# Altium PCB 矩形板V1.0.pcbdoc (part 1 of 2)
Units mm, origin at the board's own origin, x right, y up, seen from the top; angles counter-clockwise.
Board outline 153.82 x 190.84 mm, 2 copper layers (Top Layer, Bottom Layer); 147 components, 203 nets, 678 pads, 268 vias.
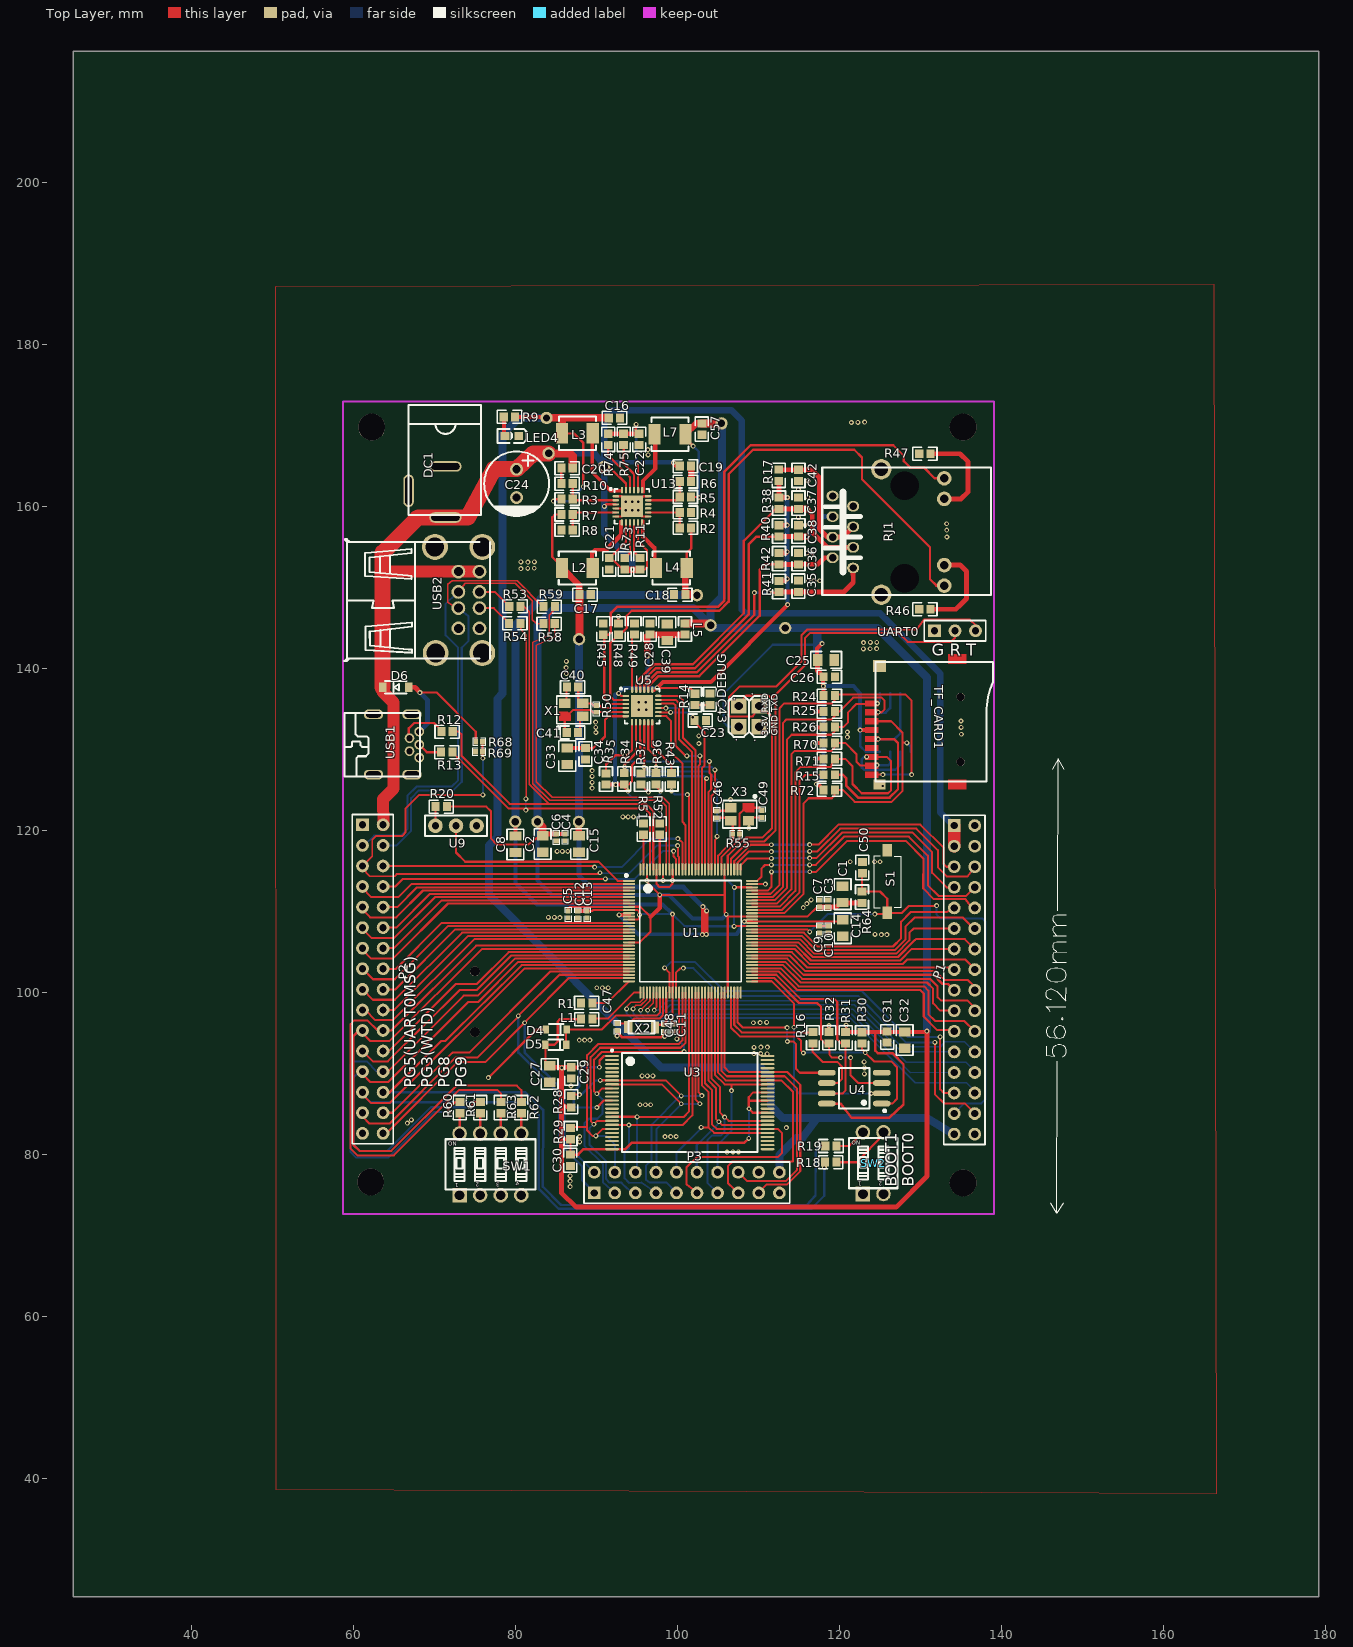
[diagram p0: Top Layer view]
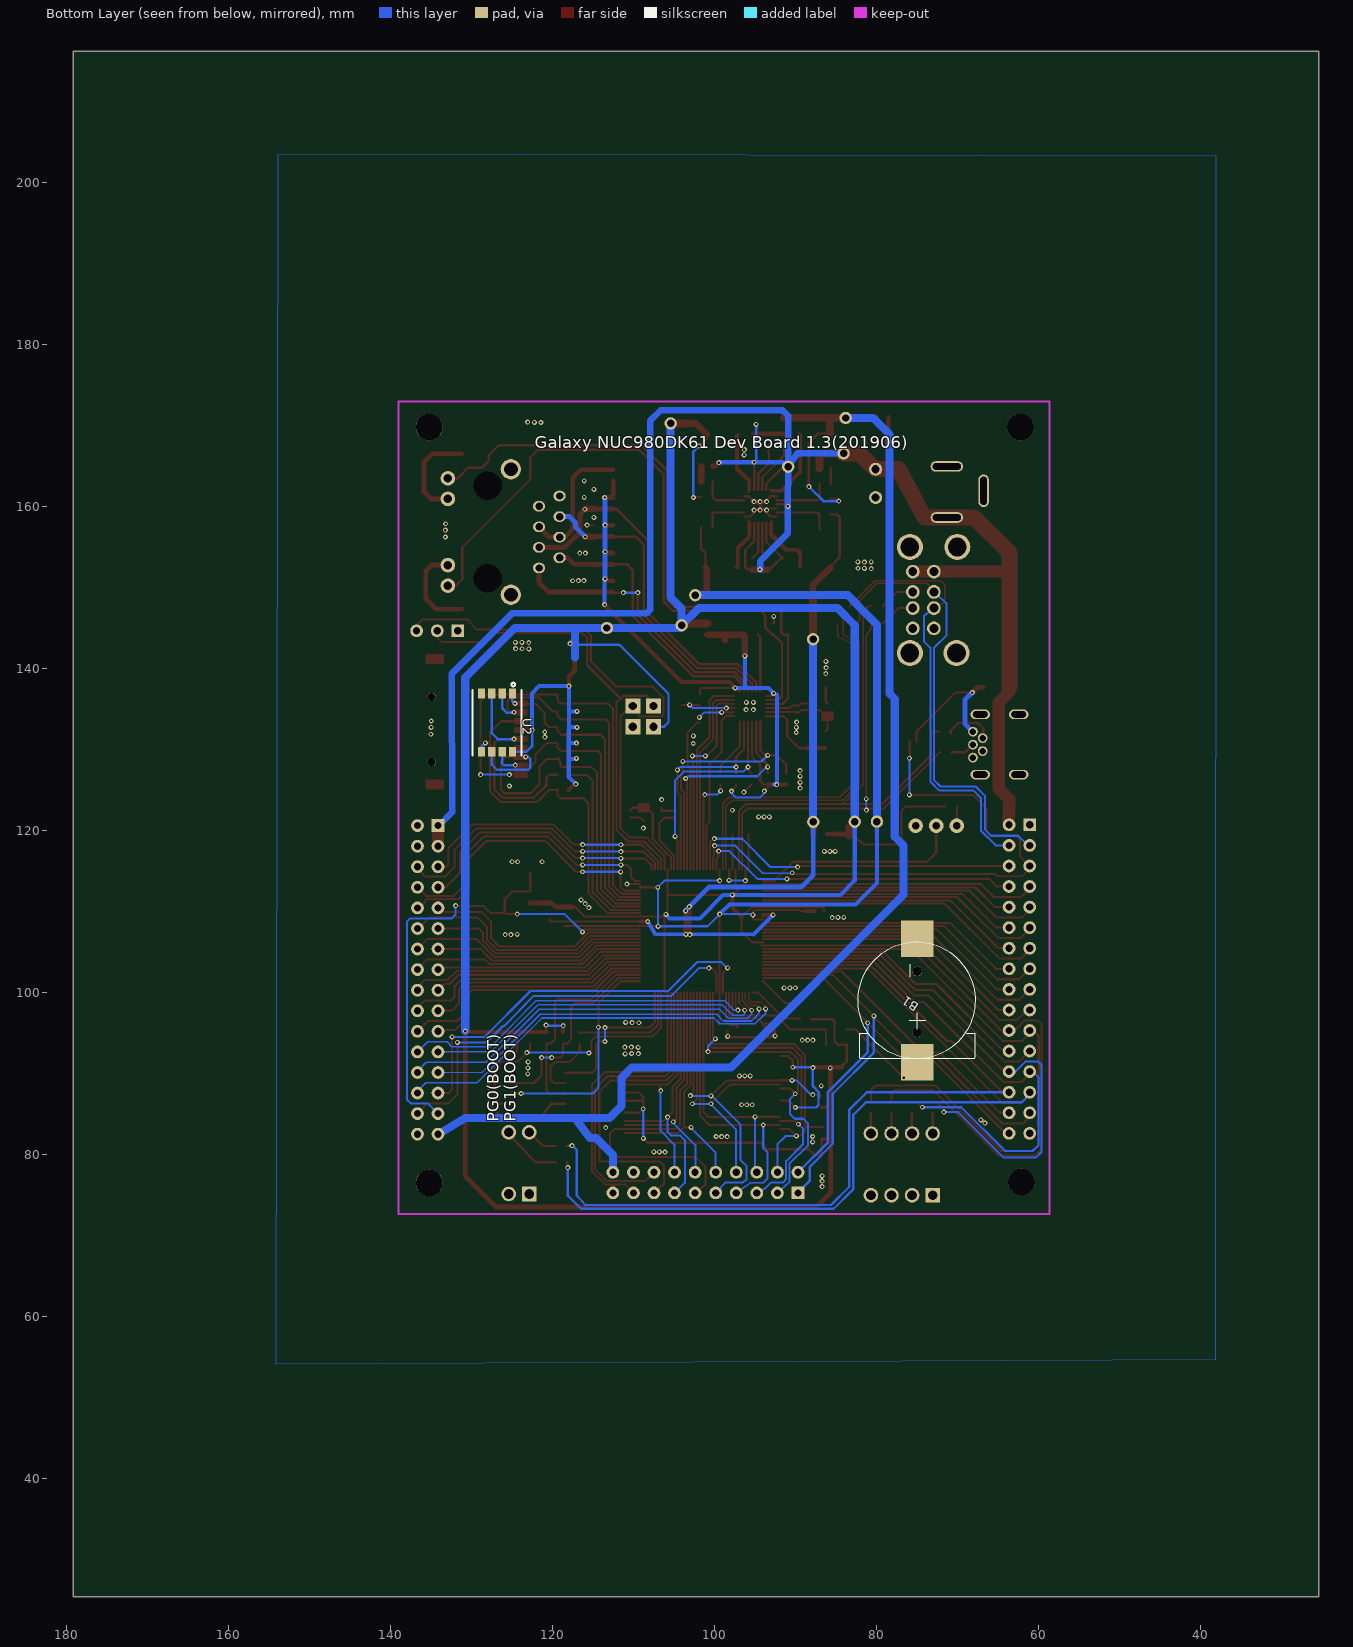
[diagram p1: Bottom Layer view, seen from below]

## Layer stack, top to bottom
Top Layer: signal copper (thickness not stored)
Dielectric: dielectric 0.32, FR-4, Dk 4.8
Bottom Layer: signal copper (thickness not stored)

## Board outline
179.22,25.4 25.4,25.4 25.4,216.24 179.22,216.24

## Components (designator, comment, footprint, x,y, rotation, side; value= is the part's Value field where it differs from the comment)
B1 "CR1220-2" BATTERY-2 74.996,99.039 r270 bottom
C1 "10uF" 0805 120.396,112.139 r270 top
C2 "10uF" 0805 83.362,118.371 r90 top
C3 "100nF" 0402 118.58,111 r270 top
C4 "100nF" 0402 86.12,119.18 r90 top
C5 "100nF" 0402 86.5,109.66 r90 top
C6 "100nF" 0402 85.04,119.16 r90 top
C7 "100nF" 0402 117.56,111 r270 top
C8 "10uF" 0805 80,118.316 r90 top
C9 "100nF" 0402 117.56,107.78 r90 top
C10 "100nF" 0402 118.64,107.78 r90 top
C11 "100nF" 0402 99.46,95.66 r90 top
C12 "100nF" 0402 87.68,109.64 r90 top
C13 "100nF" 0402 88.84,109.64 r90 top
C14 "10uF" 0805 120.42,107.96 r90 top
C15 "10uF" 0805 87.86,118.36 r90 top
C16 "10uF" 0603 92.224,170.98 r180 top
C17 "10uF" 0603 88.596,149.139 r180 top
C18 "22uF" 0603 100.296,149.139 r0 top
C19 "10uF" 0603 100.987,165.011 r180 top
C20 "10uF" 0603 86.382,164.757 r0 top
C21 "10uF" 0603 91.589,152.946 r90 top
C22 "10uF" 0603 95.272,168.313 r90 top
C23 "15pF" 0603 102.82,133.6 r180 top
C24 "470uF" CAP-D8.0XF3.5 80.14,162.88 r0 top
C25 "10uF" 0805 118.36,141.08 r180 top
C26 "100nF" 0603 118.76,139 r180 top
C27 "10uF" 0805 84.223,89.954 r90 top
C28 "100nF" 0603 96.6,144.9 r270 top
C29 "100nF" 0603 86.89,90.081 r270 top
C30 "100nF" 0603 86.78,79.3 r90 top
C31 "100nF" 0603 125.9,94.52 r270 top
C32 "10uF" 0805 128.06,94.12 r270 top
C33 "10uF" 0805 86.396,129.189 r270 top
C34 "100nF" 0603 88.646,129.489 r270 top
C35 "10pF" 0603 114.946,150.189 r90 top
C36 "10pF" 0603 114.957,153.581 r90 top
C37 "10pF" 0603 114.957,160.439 r90 top
C38 "10pF" 0603 114.957,157.01 r90 top
C39 "10uF" 0805 98.74,144.5 r270 top
C40 "22pF" 0603 87.06,137.72 r180 top
C41 "22pF" 0603 87.04,132.12 r180 top
C42 "22nF" 0603 114.957,163.868 r270 top
C43 "100nF" 0603 104.02,136.22 r270 top
C46 "15pF" 0402 104.86,122.02 r270 top
C47 "15pF" 0402 92.58,95.74 r90 top
C48 "15pF" 0402 98.42,95.65 r90 top
C49 "15pF" 0402 110.46,122.06 r90 top
C50 "1uF" 0603 122.846,115.439 r270 top
C57 "10uF" 0603 103.019,169.583 r90 top
D4 "1N4148WS T4" SOD-323 85.04,95.44 r0 top
D5 "1N4148WS T4" SOD-323 84.98,93.56 r0 top
D6 "DSK14" SOD-123 65.22,137.7 r0 top
DC1 "DC005-2.5MM" DC-5020 69.08,161.82 r270 top
DEBUG "4pin2x2" 4PINO 110.12,135.38 r270 top
L1 "0Ω" 0603 88.801,96.72 r0 top
L2 "1.5uH" L-SMD-4.1X4.6 87.646,152.439 r0 top
L3 "1.5uH" L-SMD-4.1X4.6 87.652,169.075 r0 top
L4 "1uH" L-SMD-4.1X4.6 99.246,152.439 r180 top
L5 "0Ω" 0603 100.94,144.9 r270 top
L7 "1.5uH" L-SMD-4.1X4.6 99.082,168.948 r180 top
LED4 "KT-0603R" LED-0603 79.55,168.76 r180 top
P1 "Header-Female-2.54_2x16" HDR-16X2/2.54 136.72,100.3 r270 top
P2 "Header-Female-2.54_2x16" HDR-16X2/2.54 63.66,100.4 r270 top
P3 "Header-Female-2.54_2x10" HDR-10X2/2.54 101.16,76.54 r0 top
R1 "0" 0603 88.8,98.74 r0 top
R2 "100K" 0603 100.987,157.391 r0 top
R3 "510K" 0603 86.382,160.947 r180 top
R4 "100K" 0603 100.987,159.296 r180 top
R5 "510K" 0603 100.987,161.201 r0 top
R6 "110K" 0603 100.987,163.106 r180 top
R7 "200K" 0603 86.382,159.042 r180 top
R8 "100K" 0603 86.382,157.137 r0 top
R9 "1K" 0603 79.26,171.09 r180 top
R10 "110K" 0603 86.382,162.852 r0 top
R11 "1K" 0603 95.399,152.946 r90 top
R12 "27" 0603 71.56,132.22 r0 top
R13 "27" 0603 71.52,129.7 r0 top
R14 "33" 0603 102.18,136.2 r90 top
R15 "0" 0603 118.76,126.9 r0 top
R16 "0" 0603 116.74,94.42 r90 top
R17 "0" 0603 112.52,163.88 r270 top
R18 "10K" 0603 118.94,79.06 r0 top
R19 "10K" 0603 118.96,81.06 r0 top
R20 "10K" 0603 70.84,122.96 r0 top
R24 "10K" 0603 118.76,136.68 r180 top
R25 "10K" 0603 118.76,134.7 r180 top
R26 "10K" 0603 118.76,132.78 r180 top
R28 "100K" 0603 86.89,86.525 r270 top
R29 "100K" 0603 86.796,82.589 r90 top
R30 "10K" 0603 122.8,94.4 r90 top
R31 "10K" 0603 120.78,94.42 r90 top
R32 "10K" 0603 118.74,94.42 r90 top
R34 "4.7K" 0603 93.44,126.4 r90 top
R35 "4.7K" 0603 91.18,126.38 r90 top
R36 "4.7K" 0603 97.36,126.4 r90 top
R37 "4.7K" 0603 95.5,126.38 r90 top
R38 "49.9" 0603 112.544,160.439 r90 top
R40 "49.9" 0603 112.544,157.01 r90 top
R41 "49.9" 0603 112.544,150.152 r90 top
R42 "49.9" 0603 112.544,153.581 r90 top
R43 "510" 0603 99.28,126.4 r90 top
R45 "10K" 0603 90.84,144.891 r270 top
R46 "470" 0603 130.56,147.34 r0 top
R47 "470" 0603 130.56,166.539 r0 top
R48 "10K" 0603 92.745,144.891 r270 top
R49 "12.1K" 0603 94.7,144.9 r270 top
R50 "1M" 0402 89.996,135.039 r90 top
R51 "12.1K" 0603 95.819,120.194 r270 top
R52 "12.1K" 0603 97.82,120.194 r270 top
R53 "4.7" 0603 79.94,147.7 r0 top
R54 "4.7" 0603 79.92,145.6 r0 top
R55 "1M" 0402 107.255,119.578 r180 top
R58 "4.7" 0603 84.16,145.56 r0 top
R59 "4.7" 0603 84.18,147.66 r0 top
R60 "10K" 0603 73.14,85.8 r270 top
R61 "10K" 0603 75.66,85.8 r270 top
R62 "10K" 0603 80.74,85.8 r270 top
R63 "10K" 0603 78.2,85.8 r270 top
R64 "100K" 0603 122.796,111.789 r270 top
R68 "20K" 0402 75.52,130.98 r180 top
R69 "39K" 0402 75.5,129.74 r0 top
R70 "10K" 0603 118.76,130.84 r180 top
R71 "10K" 0603 118.76,128.86 r180 top
R72 "10K" 0603 118.76,125.04 r180 top
R73 "1K" 0603 93.494,152.946 r90 top
R74 "1K" 0603 91.462,168.313 r90 top
R75 "1K" 0603 93.367,168.313 r90 top
RJ1 "HR911105A" RJ45-LIGHT 126.06,156.88 r90 top
S1 "复位按键" 复位开关 126.046,113.789 r270 top
SW1 "NDI-04H-V" NDI-04H-V 76.91,78.79 r0 top
SW2 "NDI-02H-V" NDI-02H-V 124.18,78.94 r0 top
TF_CARD1 "TF_CARD" TF-115_MRS 123.974,126.911 r0 top
U1 "NUC980DK61Y" LQFP-128_14X14X04P 101.62,107.6 r0 top
U2 "MKDV4GIL-AS" LGA-8_8PIN-L6.10-W8.10-PITCH0.65-TL 126.9,133.34 r90 bottom
U3 "MT29F2G08ABAEAWP-IT:E" TSOP-48 101.53,86.42 r90 top
U4 "W25Q128JVSIQTR" SOIC-8_208MIL 121.84,88.2 r180 top
U5 "LAN8720AI" QFN-24_4X4X05P 95.64,135.4 r0 top
U9 "3pin插针" 3PIN插针 75.2,120.6 r180 top
U13 "EA3059" QFN-24_4X4X05P 94.384,160.057 r0 top
UART0 "2.54排针 3pin" HDR-3X1/2.54 134.28,144.68 r0 top
USB1 "Mini USB-B 5P-Female-TH_C46398" USB-MINI-2 65.296,130.639 r270 top
USB2 "Double layer DIP 90° black" USB-M-51 72.98,148.48 r270 top
X1 "25MHz" OSC-YSX-3225_4P 87.2,134.92 r0 top
X2 "32.768KHz" SMD-3215_2P 95.58,95.72 r0 top
X3 "12MHz" OSC-YSX-3225_4P 107.68,122.02 r180 top
? "" ? 146.777,100.8 r0 top

## Footprints (in the part's own frame and the unit in brackets; to place one, negate y for a bottom-side part, rotate by r counter-clockwise, add the part's x,y. Pads: shape width x height; smd on the part's side, far side on the other; paste and mask are expansions set on the pad)
3PIN插针 [mm]
  round 1.8 hole 0.9: 1(0,0) 2(2.54,0) 3(5.08,0)
  silkscreen extent -1.27,-1.27 6.35,1.27
4PINO [mil]
  rect 74x74 hole 40: a(0,0) b(100,0) c(0,-100) d(100,-100)
  silkscreen extent -50,-150 150,50
0402 [mm]
  rect 0.6x0.65 smd: 1(-0.424,0) 2(0.424,0)
  silkscreen extent -0.82,-0.43 0.81,0.43
0603 [mm]
  rect 1x1.1 smd: 1(-0.7,0) 2(0.7,0)
  silkscreen extent -1.5,-0.8 1.5,0.8
0805 [mm]
  rect 1.16x1.45 smd: 1(-1.016,0) 2(1.016,0)
  silkscreen extent -1.9,-1.03 1.87,1.04
BATTERY-2 [mm]
  round 1.2 hole 1.2: 0(-3.581,0) 0(3.912,0)
  rect 4.5x4 smd: 1(7.62,0) 2(-7.62,0)
  silkscreen extent -7.22,-7.3 7.22,7.14
CAP-D8.0XF3.5 [mm]
  round 1.6 hole 1: 1(0,1.75) 2(0,-1.75)
  silkscreen extent -4,-4.04 4,3.96
DC-5020 [mm]
  oval 1.3x3.999 hole 0.8 slot 3.5 at 90 deg: 1(3.15,2.275) 2(-3.15,2.275)
  oval 3.999x1.3 hole 0.8 slot 3.5 at 0 deg: 3(-0.15,-2.275)
  silkscreen extent -10.75,-2.28 2.85,6.67
HDR-3X1/2.54 [mil]
  rect 62x62 hole 35: 1(-100,0)
  round 62 hole 35: 2(0,0) 3(100,0)
  silkscreen extent -150,-50 150,50
HDR-10X2/2.54 [mil]
  rect 62x62 hole 35: 1(-450,-50)
  round 62 hole 35: 2(-450,50) 3(-350,-50) 4(-350,50) 5(-250,-50) 6(-250,50) 7(-150,-50) 8(-150,50) 9(-50,-50) 10(-50,50) 11(50,-50) 12(50,50) 13(150,-50) 14(150,50) 15(250,-50) 16(250,50) 17(350,-50) 18(350,50) 19(450,-50) 20(450,50)
  silkscreen extent -500,-100 500,100
HDR-16X2/2.54 [mil]
  rect 62x62 hole 35: 1(-800,-100)
  round 62 hole 35: 2(-800,0) 3(-700,-100) 4(-700,0) 5(-600,-100) 6(-600,0) 7(-500,-100) 8(-500,0) 9(-400,-100) 10(-400,0) 11(-300,-100) 12(-300,0) 13(-200,-100) 14(-200,0) 15(-100,-100) 16(-100,0) 17(0,-100) 18(0,0) 19(100,-100) 20(100,0) 21(200,-100) 22(200,0) 23(300,-100) 24(300,0) 25(400,-100) 26(400,0) 27(500,-100) 28(500,0) 29(600,-100) 30(600,0) 31(700,-100) 32(700,0)
  silkscreen extent -850,-150 750,50
L-SMD-4.1X4.6 [mm]
  rect 1.5x2.5 smd: 1(-1.9,0) 2(1.9,0)
  silkscreen extent -2.3,-2.05 2.3,2.05
LED-0603 [mil]
  rect 43x39 smd: 1(33.5,0) 2(-33.5,0)
  silkscreen extent -72,-34 70,34
LGA-8_8PIN-L6.10-W8.10-PITCH0.65-TL [mm]
  rect 1.2x0.9 smd: 1(3.6,-1.905) 2(3.6,-0.635) 3(3.6,0.635) 4(3.6,1.905) 5(-3.6,1.905) 6(-3.6,0.635) 7(-3.6,-0.635) 8(-3.6,-1.905)
  silkscreen extent -4.05,-3.05 4.92,3.05
LQFP-128_14X14X04P [mm]
  oval 1.5x0.25 smd: 1(-7.6,6.2) 2(-7.6,5.799) 3(-7.6,5.4) 4(-7.6,5.001) 5(-7.6,4.6) 6(-7.6,4.201) 7(-7.6,3.8) 8(-7.6,3.401) 9(-7.6,3) 10(-7.6,2.601) 11(-7.6,2.2) 12(-7.6,1.801) 13(-7.6,1.4) 14(-7.6,1.001) 15(-7.6,0.599) 16(-7.6,0.201) 17(-7.6,-0.201) 18(-7.6,-0.599) 19(-7.6,-1.001) 20(-7.6,-1.4) 21(-7.6,-1.801) 22(-7.6,-2.2) 23(-7.6,-2.601) 24(-7.6,-3) 25(-7.6,-3.401) 26(-7.6,-3.8) 27(-7.6,-4.201) 28(-7.6,-4.6) 29(-7.6,-5.001) 30(-7.6,-5.4) 31(-7.6,-5.799) 32(-7.6,-6.2) 65(7.6,-6.2) 66(7.6,-5.799) 67(7.6,-5.4) 68(7.6,-5.001) 69(7.6,-4.6) 70(7.6,-4.201) 71(7.6,-3.8) 72(7.6,-3.401) 73(7.6,-3) 74(7.6,-2.601) 75(7.6,-2.2) 76(7.6,-1.801) 77(7.6,-1.4) 78(7.6,-1.001) 79(7.6,-0.599) 80(7.6,-0.201) 81(7.6,0.201) 82(7.6,0.599) 83(7.6,1.001) 84(7.6,1.4) 85(7.6,1.801) 86(7.6,2.2) 87(7.6,2.601) 88(7.6,3) 89(7.6,3.401) 90(7.6,3.8) 91(7.6,4.201) 92(7.6,4.6) 93(7.6,5.001) 94(7.6,5.4) 95(7.6,5.799) 96(7.6,6.2)
  oval 0.25x1.5 smd: 33(-6.2,-7.6) 34(-5.799,-7.6) 35(-5.4,-7.6) 36(-5.001,-7.6) 37(-4.6,-7.6) 38(-4.201,-7.6) 39(-3.8,-7.6) 40(-3.401,-7.6) 41(-3,-7.6) 42(-2.601,-7.6) 43(-2.2,-7.6) 44(-1.801,-7.6) 45(-1.4,-7.6) 46(-1.001,-7.6) 47(-0.599,-7.6) 48(-0.201,-7.6) 49(0.201,-7.6) 50(0.599,-7.6) 51(1.001,-7.6) 52(1.4,-7.6) 53(1.801,-7.6) 54(2.2,-7.6) 55(2.601,-7.6) 56(3,-7.6) 57(3.401,-7.6) 58(3.8,-7.6) 59(4.201,-7.6) 60(4.6,-7.6) 61(5.001,-7.6) 62(5.4,-7.6) 63(5.799,-7.6) 64(6.2,-7.6) 97(6.2,7.6) 98(5.799,7.6) 99(5.4,7.6) 100(5.001,7.6) 101(4.6,7.6) 102(4.201,7.6) 103(3.8,7.6) 104(3.401,7.6) 105(3,7.6) 106(2.601,7.6) 107(2.2,7.6) 108(1.801,7.6) 109(1.4,7.6) 110(1.001,7.6) 111(0.599,7.6) 112(0.201,7.6) 113(-0.201,7.6) 114(-0.599,7.6) 115(-1.001,7.6) 116(-1.4,7.6) 117(-1.801,7.6) 118(-2.2,7.6) 119(-2.601,7.6) 120(-3,7.6) 121(-3.401,7.6) 122(-3.8,7.6) 123(-4.201,7.6) 124(-4.6,7.6) 125(-5.001,7.6) 126(-5.4,7.6) 127(-5.799,7.6) 128(-6.2,7.6)
  silkscreen extent -8.07,-6.25 6.25,7
NDI-02H-V [mm]
  rect 1.8x1.8 hole 1.2: 1(-1.27,-3.81)
  round 1.8 hole 1.2: 2(1.27,-3.81) 3(1.27,3.81) 4(-1.27,3.81)
  silkscreen extent -3.01,-3.1 3.01,3.1
NDI-04H-V [mm]
  rect 1.8x1.8 hole 1.2: 1(-3.81,-3.81)
  round 1.8 hole 1.2: 2(-1.27,-3.81) 3(1.27,-3.81) 4(3.81,-3.81) 5(3.81,3.81) 6(1.27,3.81) 7(-1.27,3.81) 8(-3.81,3.81)
  silkscreen extent -5.55,-3.1 5.55,3.1
OSC-YSX-3225_4P [mm]
  round 0 smd: 1(-1.1,-0.8)
  rect 1.4x1.15 smd: 2(1.1,-0.8) 3(1.1,0.8) 4(-1.1,0.8)
  Top Layer region: -1.8,-0.225 -0.762,-0.225 -0.4,-0.604 -0.4,-1.375 -1.8,-1.375
  silkscreen extent -2.1,-2.35 2.1,1.7
QFN-24_4X4X05P [mm]
  oval 0.796x0.28 smd: 1(-2,1.232) 2(-2,0.732) 3(-2,0.231) 4(-2,-0.267) 5(-2,-0.767) 6(-2,-1.267) 13(2,-1.257) 14(2,-0.757) 15(2,-0.257) 16(2,0.241) 17(2,0.742) 18(2,1.242)
  oval 0.28x0.796 smd: 7(-1.245,-2) 8(-0.744,-2) 9(-0.244,-2) 10(0.254,-2) 11(0.754,-2) 12(1.255,-2) 19(1.27,2) 20(0.77,2) 21(0.269,2) 22(-0.229,2) 23(-0.729,2) 24(-1.229,2)
  rect 2.68x2.68 smd: 25(0,-0.013)
  silkscreen extent -2.84,-2.16 2.15,2.35
RJ45-LIGHT [mm]
  oval 1.3x1.499 hole 0.914: 1(-4.445,4.355) 2(-3.175,6.895) 3(-1.905,4.355) 4(-0.635,6.895) 5(0.635,4.355) 6(1.905,6.895) 7(3.175,4.355) 8(4.445,6.895)
  round 1.8 hole 1.04: 9(-6.625,-6.895) 10(-4.085,-6.895) 11(4.085,-6.895) 12(6.625,-6.895)
  round 2.5 hole 1.702: 13(-7.75,0.875) 14(7.75,0.875)
  round 2 hole 3.5 unplated: 15(5.715,-1.995) 16(-5.715,-1.995)
  silkscreen extent -7.78,-12.65 7.96,8.18
SMD-3215_2P [mm]
  rect 1x1.524 smd: 1(-1.648,0.024) 2(1.648,-0.024)
  silkscreen extent -1.6,-0.75 1.6,0.75
SOD-123 [mil]
  rect 35.8x48 smd: 1(64,0) 2(-64,0)
  silkscreen extent -53,-31 53,31
SOD-323 [mm]
  rect 0.8x1 smd: 1(-1.27,0) 2(1.27,0)
  silkscreen extent -0.89,-0.66 0.89,0.66
SOIC-8_208MIL [mm]
  oval 2.2x0.7 smd: 1(-3.4,1.905) 2(-3.4,0.635) 3(-3.4,-0.635) 4(-3.4,-1.905) 5(3.4,-1.905) 6(3.4,-0.635) 7(3.4,0.635) 8(3.4,1.905)
  silkscreen extent -3.9,-2.5 1.9,2.95
TF-115_MRS [mm]
  round 0 smd: 1(0,8.8) 2(0,7.7) 3(0,6.6) 4(0,5.5) 5(0,4.4) 6(0,3.3) 7(0,2.2) 8(0,1.1) 9(0,0) 11(10.6,-1.2) 12(10.6,14.3)
  rect 1.5x1.2 smd: 10(1,-1.2)
  rect 1.6x1.5 smd: 13(1,13.4)
  round 1 hole 1 unplated: ""(11,1.6) ""(11,9.6)
  Top Layer region: -0.8,-0.351 -0.8,0.351 0.8,0.351 0.8,-0.351
  Top Layer region: -0.8,0.749 -0.8,1.45 0.8,1.45 0.8,0.749
  Top Layer region: -0.8,1.849 -0.8,2.55 0.8,2.55 0.8,1.849
  Top Layer region: -0.8,2.949 -0.8,3.65 0.8,3.65 0.8,2.949
  Top Layer region: -0.8,4.049 -0.8,4.75 0.8,4.75 0.8,4.049
  Top Layer region: -0.8,5.151 -0.8,5.85 0.8,5.85 0.8,5.151
  Top Layer region: -0.8,6.251 -0.8,6.949 0.8,6.949 0.8,6.251
  Top Layer region: -0.8,7.351 -0.8,8.049 0.8,8.049 0.8,7.351
  Top Layer region: -0.8,8.451 -0.8,9.149 0.8,9.149 0.8,8.451
  Top Layer region: 9.499,13.701 9.499,14.9 11.699,14.9 11.699,13.701
  Top Layer region: 9.499,-1.801 9.499,-0.6 11.699,-0.6 11.699,-1.801
  silkscreen extent 0.5,-0.82 15,13.92
TSOP-48 [mm]
  oval 0.28x1.696 smd: 1(5.75,9.6) 2(5.25,9.6) 3(4.75,9.6) 4(4.25,9.6) 5(3.75,9.6) 6(3.25,9.6) 7(2.75,9.6) 8(2.25,9.6) 9(1.75,9.6) 10(1.25,9.6) 11(0.75,9.6) 12(0.25,9.6) 13(-0.25,9.6) 14(-0.75,9.6) 15(-1.25,9.6) 16(-1.75,9.6) 17(-2.25,9.6) 18(-2.75,9.6) 19(-3.25,9.6) 20(-3.75,9.6) 21(-4.25,9.6) 22(-4.75,9.6) 23(-5.25,9.6) 24(-5.75,9.6) 25(-5.75,-9.6) 26(-5.25,-9.6) 27(-4.75,-9.6) 28(-4.25,-9.6) 29(-3.75,-9.6) 30(-3.25,-9.6) 31(-2.75,-9.6) 32(-2.25,-9.6) 33(-1.75,-9.6) 34(-1.25,-9.6) 35(-0.75,-9.6) 36(-0.25,-9.6) 37(0.25,-9.6) 38(0.75,-9.6) 39(1.25,-9.6) 40(1.75,-9.6) 41(2.25,-9.6) 42(2.75,-9.6) 43(3.25,-9.6) 44(3.75,-9.6) 45(4.25,-9.6) 46(4.75,-9.6) 47(5.25,-9.6) 48(5.75,-9.6)
  silkscreen extent -6.1,-8.35 6.58,9.72
USB-M-51 [mm]
  round 3.2 hole 2.3: 0(-6.551,-2.925) 0(-6.551,2.925) 0(6.551,-2.826) 0(6.551,2.925)
  round 1.7 hole 1.1: 1(-3.5,2.574) 2(-1.001,2.574) 3(1.001,2.574) 4(3.5,2.574) 5(-3.5,-0.027) 6(-1.001,-0.027) 7(1.001,-0.027) 8(3.5,-0.027)
  silkscreen extent -7.52,-14.13 7.54,3.87
USB-MINI-2 [mm]
  oval 1.2x2.4 hole 0.8 slot 1.8 at 90 deg copper offset 0,0: 0(-3.72,1.924) 0(-3.72,-2.826) 0(3.72,1.924) 0(3.72,-2.826)
  round 1.2 hole 0.8: 1(-1.58,2.826) 2(-0.78,1.622) 3(0.02,2.826) 4(0.82,1.622) 5(1.62,2.826)
  silkscreen extent -3.89,-6.42 3.96,2.93
复位开关 [mil]
  rect 60x48 smd: 1(-150,-5) 2(155,-5)
  silkscreen extent -120,-70 130,60
? [mm]
  silkscreen extent -1.24,-28.06 1.24,28.06

## Free pads (board coordinates)
  round 1.524 hole 0.914: 1(84.096,166.589) 1(90.946,164.939) 2(87.86,143.64) 2(102.42,149.08) 2(104.1,145.36) 2(105.446,170.289) 3(83.84,170.96) 4(79.98,121.12) 4(82.72,121.1) 4(87.84,121.08) 5(113.32,145.02)
  round 3.302 hole 3.302 unplated: ""(62.125,76.619) ""(62.252,169.837) ""(135.277,76.492) ""(135.277,169.837)

## Via types
v1: diameter 0.61, hole 0.305, Top Layer to Bottom Layer, 268 vias

## Nets (pads, with @x,y where several pads share a name; then routed paths per layer and width w, separated by ;. In a path a pad name is that pad's centre, name@x,y a point inside that pad or via, vN(x,y) a via of type N, cw(c..) or ccw(c..) an arc to the next point about the centre after c; other vN are vias at no path point)
1.2V: C8.2 C9.2 C10.2 C11.2 C12.2 C13.2 C18.2 L4.1 pad.2@102.42,149.08 pad.4@79.98,121.12 R2.2 U1.10 U1.13 U1.43 U1.82 U1.94 U1.118 U1.123 | length 157.2
  Top Layer w0.25: U1.43@99.422,100.007 99.422,96.122 C11.2@99.46,96.084
  Top Layer w0.254: C13.2@88.84,110.064 89.463,110.064 89.6,110.201 92.58,110.201 U1.10@94.02,110.201
  Top Layer w0.26: U1.13@94.022,109.006 95.115,109.006 95.295,109.189 v1(95.295,109.589) 95.295,109.953 95.097,110.187 U1.10@94.022,110.207 ; U1.123@97.422,115.206 97.422,113.456 97.78,113.019 99.014,113.019 99.4,113.42 v1@99.395,113.839 ; v1(99.396,109.689) 99.422,109.662 U1.43@99.422,100.007 ; v1(99.396,113.839) 99.422,113.865 U1.118@99.422,115.206 ; v1(106.996,108.189) 107.013,108.206 107.279,108.206 109.222,108.206 117.558,108.206 C9.2@117.56,108.204 ; v1(107.046,112.989) 107.064,113.007 U1.94@109.222,113.007 ; C9.2@117.439,108.221 C10.2@118.59,108.221
  Top Layer w0.28: L4.1@101.146,152.439 101.146,154.288 101.696,154.839 101.696,157.382 R2.2@101.687,157.391
  Top Layer w0.5: pad.4@79.98,121.12 80,121.1 C8.2@80,119.332 ; C12.2@87.68,110.084 87.7,110.064 C13.2@88.84,110.064
  Top Layer w0.8: C18.2@100.996,149.139 100.996,152.289 L4.1@101.146,152.439
  Top Layer w1: C18.2@100.996,149.139 102.361,149.139 pad.2@102.42,149.08
  Bottom Layer w0.26: v1(95.295,109.589) 95.395,109.689 v1(99.396,109.689) 100.891,108.188 v1(106.996,108.189) ; v1@99.397,113.84 106.197,113.84 v1(107.046,112.989) ; v1(106.996,108.189) 106.996,112.938 v1(107.046,112.989)
  Bottom Layer w0.5: pad.4@79.98,121.12 79.979,113.56 82.639,110.9 97.68,110.9 98.184,110.9 v1@99.395,109.689
  Bottom Layer w1: pad.4@79.98,121.12 79.984,121.124 79.984,145.424 82.38,147.84 82.38,147.88 83.579,149.079 pad.2@102.42,149.08
1.8V: C14.2 C15.2 C17.2 L2.1 pad.2@87.86,143.64 pad.4@87.84,121.08 R7.2 U1.11 U1.12 U1.83 U1.84 | length 104.3
  Top Layer w0.26: U1.12@94.02,109.401 94.022,109.403 U1.12@94.022,109.407 ; U1.83@109.22,108.601 109.22,108.605 U1.83@109.222,108.607
  Top Layer w0.3: R7.2@85.682,159.042 85.679,159.039 84.896,159.039 84.546,158.689 84.546,153.789 85.746,152.588 L2.1@85.746,152.439 ; v1(108.28,108.78) 120.237,108.78 120.42,108.963 C14.2@120.42,108.976
  Top Layer w0.5: v1(92.796,109.589) 93.805,109.589 94.022,109.6 ; v1(103.08,107.16) 103.14,107.22 v1(103.14,110.62) ; v1(103.58,107.18) 103.6,107.2 v1(103.6,110.1) ; v1(108.28,108.78) 109.218,108.78 109.222,108.776
  Top Layer w0.8: L2.1@85.746,152.439 87.896,150.289 C17.2@87.896,149.139 ; pad.4@87.84,121.08 87.84,119.396 C15.2@87.86,119.376
  Top Layer w1: pad.2@87.86,143.64 87.896,143.676 C17.2@87.896,149.139
  Bottom Layer w0.5: v1@92.796,109.58 95.197,107.19 107.34,107.22 v1(108.28,108.78)
  Bottom Layer w0.6: pad.4@87.841,121.081 87.841,114.5 89.319,113.019 100.739,113.019 v1(103.14,110.62) 103.172,110.568 103.64,110.1 v1@103.599,110.1
  Bottom Layer w1: pad.4@87.86,121.26 pad.2@87.86,143.64
3.3V: C1.2 C2.2 C3.2 C4.2 C5.2 C6.2 C7.2 C25.2 C26.2 C27.2 C29.1 C30.2 C31.1 C32.1 C57.2 D5.1 DEBUG.d L1.1 L5.1 L7.1 pad.2@104.1,145.36 pad.2@105.446,170.289 pad.4@82.72,121.1 pad.5 R5.2 R20.2 R24.2 R25.2 R26.2 R28.2 R29.1 R30.2 R31.2 R32.2 R64.2 R70.2 R71.2 R72.2 TF_CARD1.4 U1.9 U1.20 U1.60 U1.85 U1.102 U1.121 U1.126 U2.8 U3.1 U3.12 U3.24 U3.34 U3.37 U3.39 U4.8 | length 555.4
  Top Layer w0.25: C5.2@86.5,110.084 86.5,110.4 86.7,110.599 U1.9@94.02,110.6 ; v1(108.84,85.66) 108.81,85.69 108.81,87.09 109.39,87.67 U3.39@111.13,87.67
  Top Layer w0.254: R20.2@71.54,122.96 76.401,122.96 76.964,122.432 76.959,119.039 77.66,118.299 81.569,118.299 83.073,119.387 C2.2@83.362,119.387 ; U1.85@109.222,109.407 116.088,109.407 117.256,110.575 C7.2@117.56,110.576
  Top Layer w0.26: U1.20@94.023,106.207 95.364,106.207 96.7,107.543 96.7,109.341 95.428,110.606 U1.9@94.023,110.606 ; U1.126@96.223,115.206 v1(96.223,113.84) 96.223,113.689 97.866,112.041 105.862,112.041 U1.102@105.824,115.206 ; U1.121@98.219,115.201 98.219,113.87 v1(98.24,113.85) ; 105.843,113.636 105.846,109.839 v1(106.033,109.653) 106.278,109.407 ; U1.60@106.222,100.007 106.222,109.352 106.277,109.407 ; U1.85@109.222,109.407 106.278,109.407
  Top Layer w0.28: v1@90.061,85.81 90.909,86.669 U3.12@91.93,86.67 ; v1(90.37,90.78) 90.37,91.6 90.94,92.17 U3.1@91.93,92.171
  Top Layer w0.3: C27.2@84.223,90.97 83.71,91.483 D5.1@83.71,93.56 84.68,93.56 84.82,93.56 85.22,93.96 85.22,96.42 85.52,96.72 L1.1@88.101,96.72 ; R29.1@86.796,81.889 86.796,80.016 C30.2@86.78,80 87.742,80 88.412,80.67 U3.24@91.93,80.67 ; U3.24@91.93,80.67 93.581,80.669 94.379,81.469 108.28,81.469 v1@108.811,82 ; L7.1@100.982,168.948 100.982,168.453 v1(101.946,167.489) ; R5.2@101.687,161.201 102.584,161.201 v1(102.646,161.139) ; v1(108.84,85.66) 109.33,85.17 U3.34@111.13,85.17 ; 108.84,86.67 109.699,86.67 U3.37@111.13,86.67 ; U4.8@118.44,86.295 120.152,86.295 121.501,84.558 126.192,84.561 127.919,86.181 127.919,91.16 126.561,92.521 124.739,92.521 124.432,92.828 124.432,95.119 ; R31.2@120.78,95.12 120.84,95.18 v1(120.84,95.98)
  Top Layer w0.4: v1@85.815,90.781 85.747,90.712 85.747,86.398 ; R29.1@86.763,81.887 86.066,81.887 85.747,82.207 85.747,86.398 ; R28.2@86.89,85.824 86.32,85.824 85.747,86.398
  Top Layer w0.5: C27.2@84.223,90.97 84.412,90.781 C29.1@86.89,90.781 86.932,90.739 v1(87.896,90.739) ; C6.2@85.04,119.584 86.1,119.584 C4.2@86.12,119.604 ; 96.7,109.341 97.82,110.461 v1(97.82,112.059) ; v1(117.02,132.76) 118,132.76 R26.2@118.02,132.78 ; v1(117.02,134.72) 118,134.72 R25.2@118.02,134.7 ; v1(117.08,128.92) 118,128.92 R71.2@118.06,128.86 ; v1(117.08,130.82) 118.02,130.82 R70.2@118.04,130.84 ; v1(117.16,125.74) 117.34,125.74 R72.2@118.04,125.04 ; C25.2@117.264,141.36 117.264,142.504 v1(117.86,143.1) ; R24.2@118,136.72 118.02,136.74 v1(118.02,137.84) 118,137.84 C26.2@118,139.06 ; v1(118.72,95.92) 118.72,95.14 R32.2@118.74,95.12 ; R31.2@120.78,95.12 128.044,95.12 C32.1@128.06,95.136 130.716,95.136 v1(130.82,95.24) ; v1(122.56,132.42) 123.965,132.42 TF_CARD1.4@123.974,132.411
  Top Layer w0.6: C2.2@83.362,119.387 83.559,119.584 C6.2@85.04,119.584 ; v1(85.747,90.712) 85.694,90.713 85.682,75.272 87.5,73.509 127.005,73.509 130.82,77.337 v1(130.82,95.24) ; C25.2@117.264,141.36 117.3,141.36 117.3,139.76 C26.2@118,139.06 ; C7.2@117.56,110.576 C3.2@118.58,110.576 ; C3.2@118.58,110.56 119.56,110.56 C1.2@120.396,111.123 ; C1.2@120.396,111.139 120.396,111.081 R64.2@122.796,111.081
  Top Layer w0.8: L7.1@100.982,168.948 102.317,170.283 C57.2@103.019,170.283
  Top Layer w1: pad.4@82.72,121.1 83.362,120.458 C2.2@83.362,119.387 ; L5.1@100.94,145.6 104.099,145.6 pad.2@104.099,145.361 ; C57.2@103.019,170.283 103.025,170.289 pad.2@105.446,170.289
  Bottom Layer w0.26: v1(96.223,113.84) 96.233,113.85 v1(98.24,113.85)
  Bottom Layer w0.28: v1(87.896,90.739) 87.896,90.78 v1(90.37,90.78)
  Bottom Layer w0.3: v1(87.896,90.739) 87.897,88.447 87.191,87.711 87.199,86.103 87.493,85.81 v1(90.06,85.81) ; v1@101.947,167.49 102.646,166.789 v1@102.646,161.14 ; DEBUG.d@107.579,132.846 106.261,132.846 105.72,133.379 105.72,136.91 111.782,142.96 117.16,142.96 ; v1(108.81,82) 108.84,82 v1(108.84,85.66) ; 117.264,141.36 117.46,141.556 117.46,143.1 v1(117.86,143.1) ; v1(118.72,95.92) 120.84,95.92 v1(120.84,95.98) ; v1(122.56,132.42) 122.56,130.44 123.26,129.74 U2.8@124.995,129.74
  Bottom Layer w0.5: pad.4@82.72,121.1 82.72,113.839 84.501,112.059 v1(97.82,112.059) 98.961,112.059 101.859,109.161 105.572,109.161 v1@106.035,109.648 ; v1(117.02,132.76) 117.04,132.78 118.02,132.78 ; v1(117.02,134.72) 117.04,134.7 118.02,134.7 ; v1(117.08,128.92) 117.14,128.86 118.06,128.86 ; v1(117.08,130.82) 117.1,130.84 118.04,130.84 ; v1(117.16,125.74) 118.039,126.618 118.039,127.261 ; v1(118.02,137.84) 121.722,137.84 122.56,136.96 v1(122.56,132.42) ; v1@118.02,137.84 118.039,127.22
  Bottom Layer w0.6: 117.371,143.603 117.86,143.114 v1(117.86,143.1)
  Bottom Layer w1: pad.4@82.72,121.1 82.72,145.361 84.859,147.499 101.961,147.499 104.099,145.361 104.099,147.443 105.496,148.838 105.496,170.237 pad.2@105.446,170.289 ; pad.2@104.1,145.36 104.1,145.02 pad.5@113.32,145.02 ; 117.264,141.36 117.264,145.02 pad.5@113.32,145.02 ; v1(130.82,95.24) 130.82,138.899 124.699,145.02 pad.5@113.32,145.02
+5V: C19.2 C20.2 C21.2 C22.2 C24.1 D6.2 DC1.1 P1.1 P1.3 P2.2 pad.1 R11.1 R73.1 R74.2 R75.2 U13.3 U13.8 U13.11 U13.20 U13.23 USB2.1 USB2.5 | length 244.9
  Top Layer w0.28: pad.1@90.797,164.889 91.696,164.789 93.654,162.879 U13.23@93.655,162.057 ; R73.1@93.494,152.245 93.239,152.245 92.696,152.789 91.839,153.646 C21.2@91.589,153.646 91.603,153.646 93.646,155.689 93.646,158.05 U13.8@93.64,158.057 ; U13.11@95.138,158.057 95.137,155.747 95.246,155.639 96.246,154.639 96.246,154.239 96.246,153.189 96.246,152.539 96.146,152.439 95.953,152.245 R11.1@95.399,152.245 ; v1(95.146,165.489) 95.146,162.064 U13.20@95.153,162.057
  Top Layer w0.3: v1(90.976,160.038) 91.226,160.289 U13.3@92.383,160.289 ; v1(94.9,170.16) 94.879,169.404 C22.2@95.273,169.013
  Top Layer w0.5: R74.2@91.462,169.013 C22.2@95.272,169.013
  Top Layer w0.6: v1(99.496,165.439) 99.924,165.011 C19.2@100.287,165.011
  Top Layer w0.8: R73.1@93.494,152.245 v1(94.446,152.246) R11.1@95.399,152.245
  Top Layer w1: pad.1@84.096,166.589 86.751,166.587 87.081,166.242 C20.2@87.082,164.757
  Top Layer w1.5: D6.2@63.594,137.7 63.594,137.185 64.945,135.835 64.945,125.188 63.635,123.877 63.696,120.72 P2.2@63.66,120.72 ; 63.721,150.222 63.439,150.24 63.596,151.98 USB2.5@72.953,151.98 73.737,151.98 USB2.1@75.554,151.98 ; P1.3@134.18,118.08 P1.1@134.18,120.62
  Top Layer w2: D6.2@63.594,137.7 63.594,154.312 67.881,158.599 67.912,158.569 68.013,158.67 DC1.1@71.355,158.67 ; DC1.1@71.354,158.67 74.11,158.67 77.305,164.616 80.152,164.642 82.207,166.587 pad.1@84.096,166.589
  Bottom Layer w0.3: v1(94.9,170.16) 94.9,165.735 v1(95.146,165.489)
  Bottom Layer w0.6: pad.1@90.946,164.939 91.496,165.489 v1(95.146,165.489) ; v1(95.146,165.489) 99.496,165.488 v1@99.496,165.44
  Bottom Layer w0.8: pad.1@84.096,166.589 89.796,166.589 pad.1@90.946,164.939 v1(90.976,160.038) 90.996,156.689 94.396,153.289 v1@94.396,152.189 ; pad.1@90.94,164.939 90.94,171.22 91.641,171.919 106.68,171.919 107.96,170.639 107.96,147.299 108.44,146.819 125.044,146.819 132.456,139.402 132.441,122.28 134.099,120.619 P1.1@134.18,120.62
ADC_3.3V: L1.2 U1.33 | length 7.3
  Top Layer w0.254: L1.2@89.499,96.72 89.499,96.781 91.407,96.781 94.617,99.999 U1.33@95.42,100.001
B1_1: B1.1 D4.1 | length 9.6
  Top Layer w0.3: v1(76.67,89.49) 82.62,95.44 D4.1@83.77,95.44
C32_2: C32.2
C43_1: C43.1
E3.3V: C28.2 C39.2 L5.2 R14.2 R17.2 R34.1 R35.1 R36.1 R38.2 R40.2 R41.2 R42.2 U5.1 U5.9 U5.19 | length 95.2
  Top Layer w0.254: R34.1@93.44,125.7 93.44,125.314 v1(93.875,124.879) ; R36.1@97.36,125.7 97.36,125.458 v1(97.939,124.879) ; v1@97.495,137.639 101.562,137.639 101.846,137.355 R14.2@101.846,136.786
  Top Layer w0.28: v1(92.746,136.939) 93.053,136.632 U5.1@93.64,136.632 ; R34.1@93.44,125.7 94,125.699 94.399,126.1 94.399,128.071 95.4,129.069 U5.9@95.395,133.489 ; U5.19@96.896,137.288 97.146,137.288 v1(97.496,137.639)
  Top Layer w0.5: R35.1@91.18,125.68 v1(92.36,125.68) 93.42,125.68 R34.1@93.44,125.7 ; v1@97.495,137.639 98.217,138.36 104.12,138.36 113.66,147.901 113.659,147.9 v1(113.6,147.9)
  Top Layer w0.6: R41.2@112.544,150.852 113.309,150.851 v1(113.546,151.089) ; R42.2@112.544,154.281 113.388,154.28 v1(113.546,154.439) ; R40.2@112.544,157.71 113.517,157.709 v1(113.546,157.739) ; R17.2@112.544,163.167 R38.2@112.544,161.139 v1(113.596,161.139)
  Top Layer w0.8: v1(96.296,141.589) 96.301,144.053 96.447,144.2 L5.2@100.94,144.2 ; 98.673,144.2 98.74,144.132 C39.2@98.74,143.484
  Bottom Layer w0.254: v1(93.875,124.879) 93.875,124.625 94.383,124.117 97.431,124.117 97.939,124.625 v1(97.939,124.879)
  Bottom Layer w0.5: 92.697,125.688 92.319,125.688 92.319,136.826 v1(92.746,136.939) ; v1(92.746,136.939) 92.745,136.989 93.397,137.639 97.497,137.639 96.296,137.639 v1(96.296,141.589) ; v1(113.546,151.089) 113.599,151.088 113.599,150.405 v1@113.599,147.901
  Bottom Layer w0.6: v1(113.546,151.089) v1(113.546,154.439) v1(113.546,157.739) 113.546,161.089 v1(113.596,161.139)
FB1: R2.1 R4.2 U13.14 | length 5.8
  Top Layer w0.28: U13.14@96.384,159.3 96.388,159.296 R4.2@100.287,159.296 R2.1@100.287,157.391
FB2: R7.1 R8.2 U13.5 | length 7.3
  Top Layer w0.28: R8.2@87.082,157.137 R7.1@87.082,159.042 87.331,159.29 U13.5@92.383,159.29
FB3: R3.1 R10.2 U13.2 | length 7.3
  Top Layer w0.28: R10.2@87.082,162.852 R3.1@87.082,160.947 87.24,160.789 U13.2@92.383,160.789
FB4: R5.1 R6.2 U13.17 | length 6
  Top Layer w0.28: U13.17@96.384,160.799 99.886,160.799 R5.1@100.287,161.201 R6.2@100.287,163.106
GND: B1.2 C1.1 C2.1 C3.1 C4.1 C5.1 C6.1 C7.1 C8.1 C9.1 C10.1 C11.1 C12.1 C13.1 C14.1 C15.1 C16.1 C17.1 C18.1 C19.1 C20.1 C21.1 C22.1 C23.1 C24.2 C25.1 C26.1 C27.1 C28.1 C29.2 C30.1 C31.2 C33.2 C34.2 C35.2 C36.2 C37.2 C38.2 C39.1 C40.2 C41.1 C42.2 C46.1 C47.1 C48.1 C49.1 C50.1 C57.1 DC1.2 DC1.3 DEBUG.b LED4.2 P1.2 P1.4 P1.32 P2.1 P2.31 P3.19 R1.1 R4.1 R6.1 R8.1 R10.1 R37.1 R45.1 R46.1 R47.1 R48.1 R49.1 R51.1 R52.1 R69.1 RJ1.8 RJ1.13 RJ1.14 S1.1 SW1.1 SW1.2 SW1.3 SW1.4 SW2.1 SW2.2 TF_CARD1.6 TF_CARD1.10 TF_CARD1.11 TF_CARD1.12 TF_CARD1.13 U1.64 U1.95 U1.128 U2.4 U3.2 U3.13 U3.23 U3.25 U3.36 U3.48 U4.4 U5.25 U9.1 U13.1 U13.4 U13.6 U13.13 U13.18 U13.25 UART0.1 USB1.0 USB1.5 USB2.0 USB2.4 USB2.8 X1.2 X1.4 X3.2 X3.4 | length 36.4
  Top Layer w0.24: U1.95@109.22,113.399 109.221,113.4 v1(110.86,113.4) ; C38.2@114.957,157.71 115.727,157.709 v1(115.757,157.74)
  Top Layer w0.254: R37.1@95.5,125.68 95.5,125.667 v1(96.415,124.752)
  Top Layer w0.28: X1.4@86.1,135.72 86.308,135.928 C40.2@86.308,137.638 ; C41.1@87.984,132.288 87.984,133.577 X1.2@88.296,133.889 ; U13.6@92.383,158.79 93.128,158.79 U13.25@94.384,160.044 ; U13.4@92.383,159.791 94.129,159.791 U13.25@94.384,160.044 ; U13.1@92.383,161.289 93.138,161.289 93.768,160.66 U13.25@94.384,160.044 ; U13.13@96.384,158.8 95.628,158.8 U13.25@94.384,160.044 ; U13.18@96.384,161.299 95.807,161.3 95.146,160.638 94.977,160.638 U13.25@94.384,160.044 ; C46.1@104.86,122.444 106.544,122.444 106.58,122.48 X3.2@106.58,122.82 ; X3.4@108.78,121.22 109.196,121.636 C49.1@110.46,121.636
  Top Layer w0.3: R10.1@85.682,162.852 C20.1@85.682,164.757 ; v1(92.56,94.65) 92.58,94.67 C47.1@92.58,95.316 ; C47.1@92.58,95.316 92.58,95.079 93.149,94.51 98.011,94.51 98.42,94.919 98.42,95.226 98.42,94.61 v1(98.43,94.6) ; v1(92.72,146.46) 92.72,145.616 R48.1@92.745,145.591
  Top Layer w0.8: R6.1@101.687,163.106 C19.1@101.687,165.011
  other v1: 86.758,76.05 86.758,76.71 86.758,77.369 106.15,80.31 106.84,80.34 107.52,80.34 87.919,81.571 87.919,82.231 98.47,82.22 99.17,82.22 99.84,82.23 113.47,83.32 66.66,83.88 67.14,84.28 95.38,86.15 96.04,86.15 96.7,86.15 86.86,88.48 95.64,89.72 96.3,89.72 96.96,89.72 123.1,89.96 123.06,91.44 111.08,92.42 109.44,92.46 110.28,92.48 109.46,93.24 110.3,93.26 111.1,93.28 87.88,94.14 88.54,94.14 89.2,94.14 109.379,96.28 110.22,96.3 111.02,96.32 90.74,100.58 91.44,100.58 90.04,100.6 125.18,107.16 125.88,107.16 124.4,107.18 84.08,109.28 84.8,109.28 85.5,109.26 115.54,110.5 116,111 116.5,111.44 121.32,116.16 124.36,116.16 125.02,116.16 85.14,117.44 85.8,117.44 86.46,117.44 108.82,120.32 93.26,121.7 93.92,121.7 94.58,121.7 97.82,122.52 106.56,123.84 89.46,125.24 125.371,125.514 89.46,125.96 89.46,126.7 89.46,127.4 102.66,130.76 120.98,131.54 102.64,131.7 135.06,131.9 89.94,132.12 121,132.18 135.04,132.74 89.92,132.76 89.9,133.4 135.02,133.54 95.246,134.939 96.146,134.939 95.246,135.839 96.096,135.839 86.299,139.379 86.26,140.12 86.28,140.9 122.96,142.44 123.8,142.46 124.6,142.48 122.98,143.22 123.82,143.239 124.62,143.26 117.56,150.86 116.18,150.88 116.86,150.88 80.68,152.36 81.52,152.38 82.32,152.4 81.54,153.16 80.68,153.18 82.34,153.18 115.98,154.28 116.68,154.28 133.28,156.26 133.26,157.1 133.24,157.9 114.94,158.68 93.596,159.588 94.396,159.588 95.146,159.588 93.596,160.638 94.396,160.638 95.146,160.638 116.12,161.16 114.94,162.14 116.12,163.18 96.38,166.4 96.36,167.06 121.481,170.399 122.281,170.419 123.121,170.439
GND1: R1.2 U1.32 | length 5.6
  Top Layer w0.254: R1.2@89.5,98.74 91.361,98.74 U1.32@94.02,101.4
LINK_LED: R45.2 RJ1.12 U5.3 | length 75.8
  Top Layer w0.28: R45.2@90.84,144.191 90.954,144.077 90.954,136.309 91.632,135.631 U5.3@93.64,135.631
  Top Layer w0.3: R45.2@90.84,144.191 91.496,144.187 91.796,144.487 91.796,146.887 92.547,147.639 105.001,147.639 105.801,148.439 105.801,164.342 109.047,167.588 126.647,167.588 127.947,166.288 127.947,165.637 128.747,164.837 130.447,164.837 131.778,163.506 RJ1.12@133.284,163.506
LX1: L4.2 U13.12 | length 13
  Top Layer w0.28: U13.12@95.638,158.059 95.649,156.237 97.096,154.792 97.096,152.439 L4.2@97.346,152.439 ; 95.796,158.289 95.8,156.428 97.251,154.983 97.251,152.628 L4.2@97.5,152.628
LX2: L2.2 U13.7 | length 15.7
  Top Layer w0.28: L2.2@89.346,152.628 89.346,154.333 89.782,154.77 91.104,154.786 92.946,156.628 92.939,158.248 ; L2.2@89.546,152.439 89.546,154.144 89.982,154.58 91.304,154.596 93.146,156.438 U13.7@93.138,158.059
LX3: L3.2 U13.24 | length 18.6
  Top Layer w0.28: L3.2@89.394,168.897 89.394,164.249 91.746,161.879 92.996,161.879 ; L3.2@89.552,169.075 89.552,164.292 91.772,162.056 U13.24@93.154,162.057
LX4: L7.2 U13.19 | length 15.2
  Top Layer w0.28: U13.19@95.654,162.057 95.653,163.245 97.147,164.739 97.147,168.912 L7.2@97.182,168.948 ; 95.849,161.787 95.838,163.131 97.375,164.668 97.375,168.749 L7.2@97.411,168.785
OTH3.3V: C16.2 L3.1 P1.31 P3.20 pad.3 R3.2 R9.1 | length 173.4
  Top Layer w0.3: v1(84.696,160.689) 84.954,160.947 R3.2@85.682,160.947 ; L3.1@85.752,169.075 85.788,169.039 87.246,169.039 88.396,167.889 v1(88.396,162.489)
  Top Layer w0.5: R9.1@79.96,171.09 83.71,171.09 pad.3@83.84,170.96
  Top Layer w0.9: pad.3@83.843,170.979 86.139,170.979 ; L3.1@85.752,169.075 85.796,169.118 85.796,170.639 86.137,170.98 C16.2@91.524,170.98
  Bottom Layer w0.3: v1(84.696,160.689) 86.596,160.689 v1(88.396,162.489)
  Bottom Layer w1: pad.3@83.84,170.96 80.442,170.959 78.42,168.942 78.42,136.92 77.78,136.28 77.78,119.239 76.718,118.18 76.718,112.087 98.011,90.74 110.259,90.74 111.539,89.46 111.539,85.991 113.01,84.52 130.82,84.51 134.064,82.521 P1.31@134.181,82.521 ; P3.20@112.59,77.81 112.591,79.94 114.681,82.031 115.43,82.041 117.267,84.53 118.671,84.53
P3_18: P3.18
PA0: P2.7 U1.2 | length 34.2
  Top Layer w0.254: P2.7@61.12,113.1 61.12,112.869 62.156,111.83 65.58,111.83 67.147,113.4 U1.2@94.021,113.4
PA1: P2.10 U1.3 | length 31.7
  Top Layer w0.254: P2.10@63.66,110.56 65.39,110.56 67.81,112.981 U1.3@94.361,112.981
PA2: P2.9 U1.4 | length 35
  Top Layer w0.254: P2.9@61.12,110.56 61.12,110.22 62.05,109.29 65.28,109.29 68.59,112.602 U1.4@94.021,112.602
PA3: P2.12 U1.5 | length 32.1
  Top Layer w0.254: P2.12@63.66,108.02 65.27,108.02 69.451,112.201 U1.5@94.021,112.201
PA4: P2.11 U1.6 | length 35.6
  Top Layer w0.254: P2.11@61.12,108.02 61.12,107.84 62.21,106.75 65.011,106.75 70.089,111.802 U1.6@94.021,111.802
PA5: P2.14 U1.7 | length 32.8
  Top Layer w0.254: P2.14@63.66,105.48 64.973,105.48 70.912,111.398 U1.7@94.021,111.401
PA6: P2.13 U1.8 | length 36.4
  Top Layer w0.254: P2.13@61.12,105.48 61.12,105.259 62.192,104.19 64.826,104.19 71.676,111.002 U1.8@94.021,111.002
PA7: P2.16 U1.14 | length 32.7
  Top Layer w0.254: P2.16@63.66,102.94 65.25,102.94 70.912,108.602 U1.14@94.021,108.602
PA8: P2.15 U1.15 | length 36.1
  Top Layer w0.254: P2.15@61.12,102.94 62.41,101.65 65.1,101.65 71.651,108.2 U1.15@94.021,108.2
PA9: P2.18 U1.16 | length 33.4
  Top Layer w0.254: P2.18@63.66,100.4 65.192,100.4 72.591,107.802 U1.16@94.021,107.802
PA10: P2.17 U1.17 | length 36.9
  Top Layer w0.254: P2.17@61.12,100.4 62.4,99.12 65.115,99.12 73.421,107.4 U1.17@94.021,107.4
PA11: P2.20 U1.18 | length 34.2
  Top Layer w0.254: P2.20@63.66,97.86 65.034,97.86 74.155,107.002 U1.18@94.021,107.002
PA12: P2.19 U1.19 | length 37.6
  Top Layer w0.254: P2.19@61.12,97.86 61.44,97.86 62.71,96.59 64.841,96.59 74.922,106.6 U1.19@94.021,106.6
PB0: P2.30 U1.29 | length 37.6
  Top Layer w0.254: P2.30@63.66,85.16 64.8,85.16 72.215,92.574 74.297,92.577 84.32,102.6 U1.29@94.021,102.6
PB1: P1.26 U1.36 | length 48.6
  Top Layer w0.2: v1@95.499,97.88 96.619,98.998 U1.36@96.619,100
  Bottom Layer w0.2: v1(95.46,97.82) 95.461,97.319 95.941,96.839 98.3,96.839 99.421,97.959 121.681,97.959 128.25,91.391 135.628,91.391 136.881,90.141 P1.26@136.721,90.141
PB2: P1.24 U1.38 | length 45.5
  Top Layer w0.2: v1@97.12,97.88 97.419,98.179 U1.38@97.419,100
  Bottom Layer w0.2: v1(97.14,97.84) 97.653,97.84 98.753,99.001 122.088,99.001 127.711,93.286 132.499,93.301 133.02,93.921 135.461,93.921 P1.24@136.721,92.681
PB3: P1.23 U1.37 | length 43.7
  Top Layer w0.2: v1@96.34,97.88 96.34,98.04 97.02,98.719 U1.37@97.02,100
  Bottom Layer w0.2: v1(96.32,97.82) 96.319,97.38 96.479,97.22 97.82,97.22 99.101,98.5 121.828,98.5 127.693,92.661 P1.23@134.181,92.681
PB4: P2.32 P3.2 U1.31 | length 60.4
  Top Layer w0.254: P2.32@63.66,82.62 63.739,82.661 64.12,82.661 72.827,91.419 76.251,91.419 86.601,101.802 U1.31@94.021,101.802
  Bottom Layer w0.3: v1(81.14,96.28) 81.14,92.62 86.04,87.72 86.04,81.5 P3.2@89.73,77.81